# EAGLE board Fan (EAGLE 6.3)
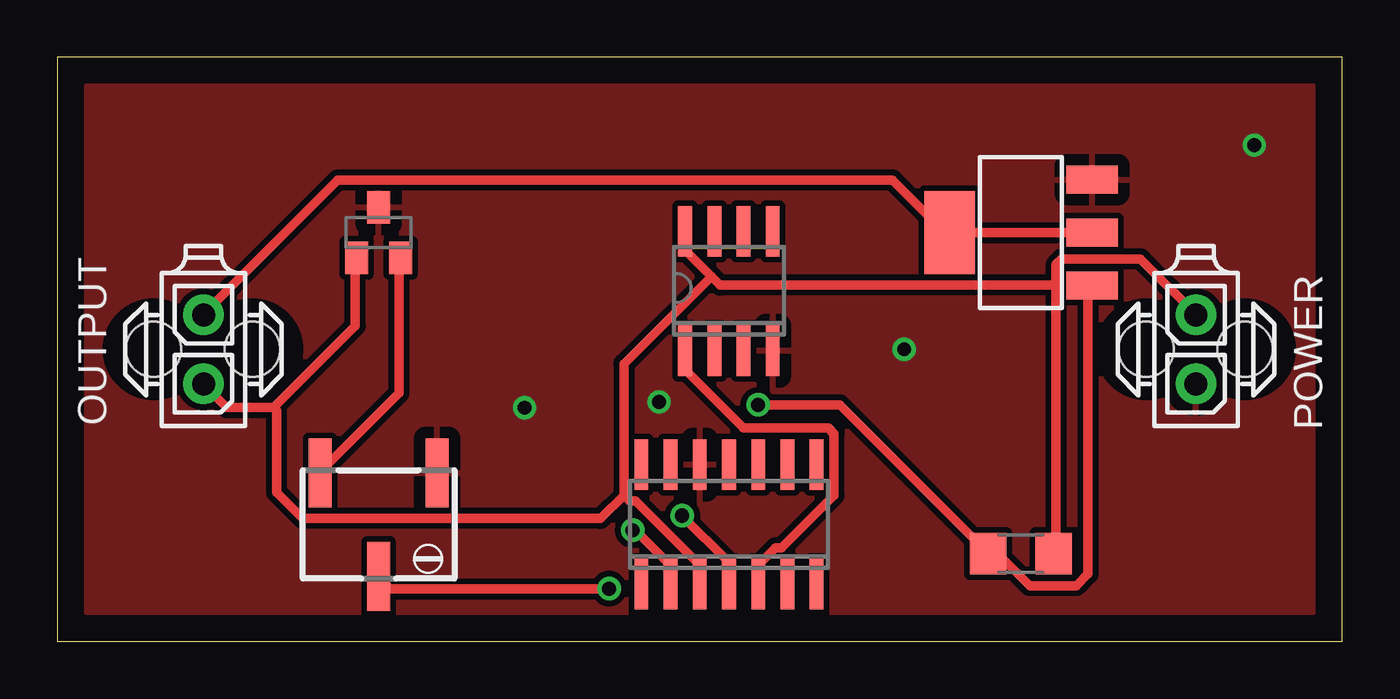
[diagram p0: board, top side]
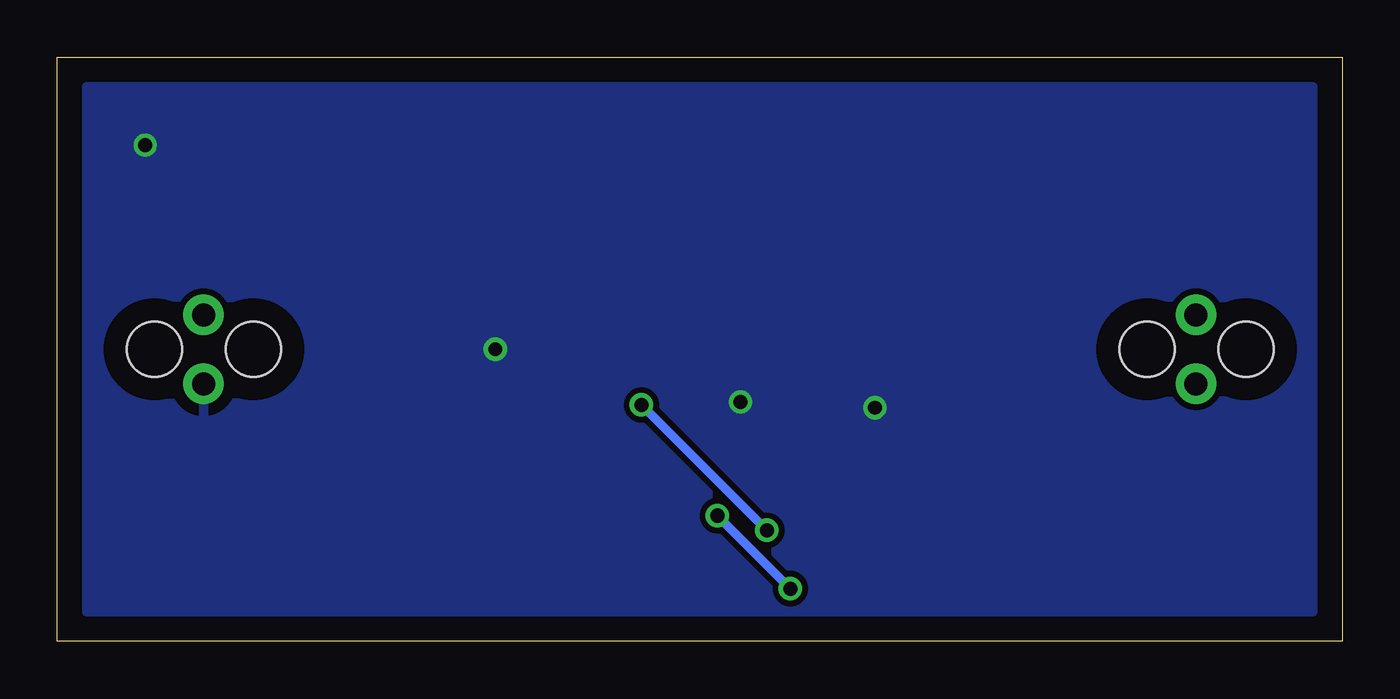
[diagram p1: board, bottom side, seen from below]

Size 55.88 x 25.4 mm. Coordinates in mm from the lower left corner, seen from the top.
Outline: 0,0 55.88,0 55.88,25.4 0,25.4 0,0
Copper layers (1*16): Top 0.035mm / dielectric 1.5mm / Bottom 0.035mm
Design rules "SJ Design Rules": minimum track width 16mil, minimum drill 24mil, track to track 10mil, track to pad 10mil, pad to pad 10mil, via to via 10mil, smd to smd 10mil, copper to edge 40mil, drill to drill 10mil, minimum pad ring 10mil, minimum via ring 8mil, stop-mask expansion 4mil, vias tented up to drill 0mil, thermal gap 20mil

## Footprints (pad centres in the part's own frame; a part is rotated, then mirrored left to right if it is on the bottom)
SO14 = smd 0.6 x 2.2: 1 -3.81,-2.6; 2 -2.54,-2.6; 3 -1.27,-2.6; 4 0,-2.6; 5 1.27,-2.6; 6 2.54,-2.6; 7 3.81,-2.6; 8 3.81,2.6; 9 2.54,2.6; 10 1.27,2.6; 11 0,2.6; 12 -1.27,2.6; 13 -2.54,2.6; 14 -3.81,2.6
794681-2 = drill 1 pad 1.778: 1 0,-1.5; 2 0,1.5 | hole 2.4: 2.13,0; -2.17,0
RTRIMTS63Y = smd 1 x 3: 1 -2.55,-2.25; 2 0,2.25; 3 2.55,-2.25
R1206 = smd 1.6 x 1.803: 1 -1.422,0; 2 1.422,0
SOT23 = smd 1 x 1.4: 1 -0.95,-1.1; 2 0.95,-1.1; 3 0,1.1
SOT223 = smd 1.219 x 2.235: 1 -2.311,-3.099; 2 0,-3.099; 3 2.311,-3.099 | smd 3.6 x 2.2: 4 0,3.099
SO-08 = smd 0.6 x 2.2: 1 -1.905,-2.6; 2 -0.635,-2.6; 3 0.635,-2.6; 4 1.905,-2.6; 5 1.905,2.6; 6 0.635,2.6; 7 -0.635,2.6; 8 -1.905,2.6

## Placement (x,y rotation side)
IC1  LM339D  [SO14]  29.21,5.08 0 top
OUTPUT  794681-2  [794681-2]  6.35,12.7 0 top
POWER  794681-2  [794681-2]  49.53,12.7 0 top
R1  10k  [RTRIMTS63Y]  13.97,5.08 180 top
U$1  100  [R1206]  41.91,3.81 0 top
U$2  MAX6103  [SOT23]  13.97,17.78 0 top
U$3  NDT3055  [SOT223]  41.91,17.78 90 top
U$4  LM35  [SO-08]  29.21,15.24 0 top

## Library data of the parts
IC1 = linear
OUTPUT POWER = con-amp
R1 = resistor
U$1 U$2 U$4 = SolarJacketsADC
U$3 = SolarJacketsADC; PART_NUM: NDT3055

## Nets
12V: IC1.3 OUTPUT.1 POWER.2 U$1.2 U$2.1 U$4.8
GND: IC1.12 POWER.1 R1.1 U$2.3 U$3.3 U$4.4
N$1: IC1.2 U$1.1 U$3.1
N$3: IC1.4 R1.2
N$4: R1.3 U$2.2
N$5: OUTPUT.2 U$3.2 U$3.4
N$8: IC1.5 U$4.1

## Tracks (layer width: path | path; a pad name or v marks a point on that pad's centre or on a via)
12V
  Top 0.406: 9.4,10.16 12.95,13.72 12.95,16.64 U$2.1 | 9.4,10.16 7.37,10.16 6.35,11.18 OUTPUT.1 | 43.43,15.49 43.43,16.38 43.69,16.64 47.12,16.64 49.53,14.22 POWER.2 | 43.43,15.49 43.43,3.81 U$1.2 | U$4.8 27.3,17.02 28.45,15.88 | 28.45,15.88 28.83,15.49 43.43,15.49 | IC1.3 27.94,3.3 25.15,6.1 24.89,6.1 24.64,6.35 | 24.64,6.35 24.64,12.06 28.45,15.88 | 24.64,6.35 23.62,5.33 10.67,5.33 9.53,6.48 9.53,10.03 9.4,10.16
GND  (via drill 0.6)
  other vias: 20.32,10.16 52.07,21.59 36.83,12.7 26.16,10.41
  pour Top: 1.27,24.13 1.27,1.27 54.61,1.27 54.61,24.13
  pour Bottom: 1.27,24.13 1.27,1.27 54.61,1.27 54.61,24.13
N$1  (via drill 0.61)
  Top 0.406: U$3.1 44.96,15.37 44.83,15.24 44.83,2.92 44.32,2.41 42.29,2.41 40.89,3.81 U$1.1 40.39,3.94 34.04,10.29 v30.48,10.29 | IC1.2 26.67,3.3 25.15,4.83 v25.02,4.83
  Bottom 0.406: v30.48,10.29 v25.02,4.83
N$3  (via drill 0.61)
  Top 0.406: IC1.4 29.21,3.43 v27.18,5.46 | v24,2.29 14.48,2.29 13.97,2.79 R1.2
  Bottom 0.406: v24,2.29 v27.18,5.46
N$4
  Top 0.406: U$2.2 14.86,16.64 14.86,10.79 11.43,7.37 R1.3
N$5
  Top 0.406: U$3.2 U$3.4 38.61,17.78 36.32,20.07 12.19,20.07 6.35,14.22 OUTPUT.2
N$8
  Top 0.406: U$4.1 27.3,11.81 29.84,9.27 33.53,9.27 33.78,9.02 33.78,6.35 31.5,4.06 31.24,4.06 30.48,3.3 IC1.5

## Text on the board
tValues: Fan Control Board / 2/26/13 REV2 | GND | 12V | GND | 12V